# Altium PCB OnePieceBoard.PcbDoc (part 2 of 2)
Units mil, origin at the board's own origin, x right, y up, seen from the top; angles counter-clockwise.
Board outline 5749.09 x 7970 mil, 2 copper layers (Top Layer, Bottom Layer); 128 components, 61 nets, 384 pads, 43 vias.
Unrouted connection lines stored in the file: 1.
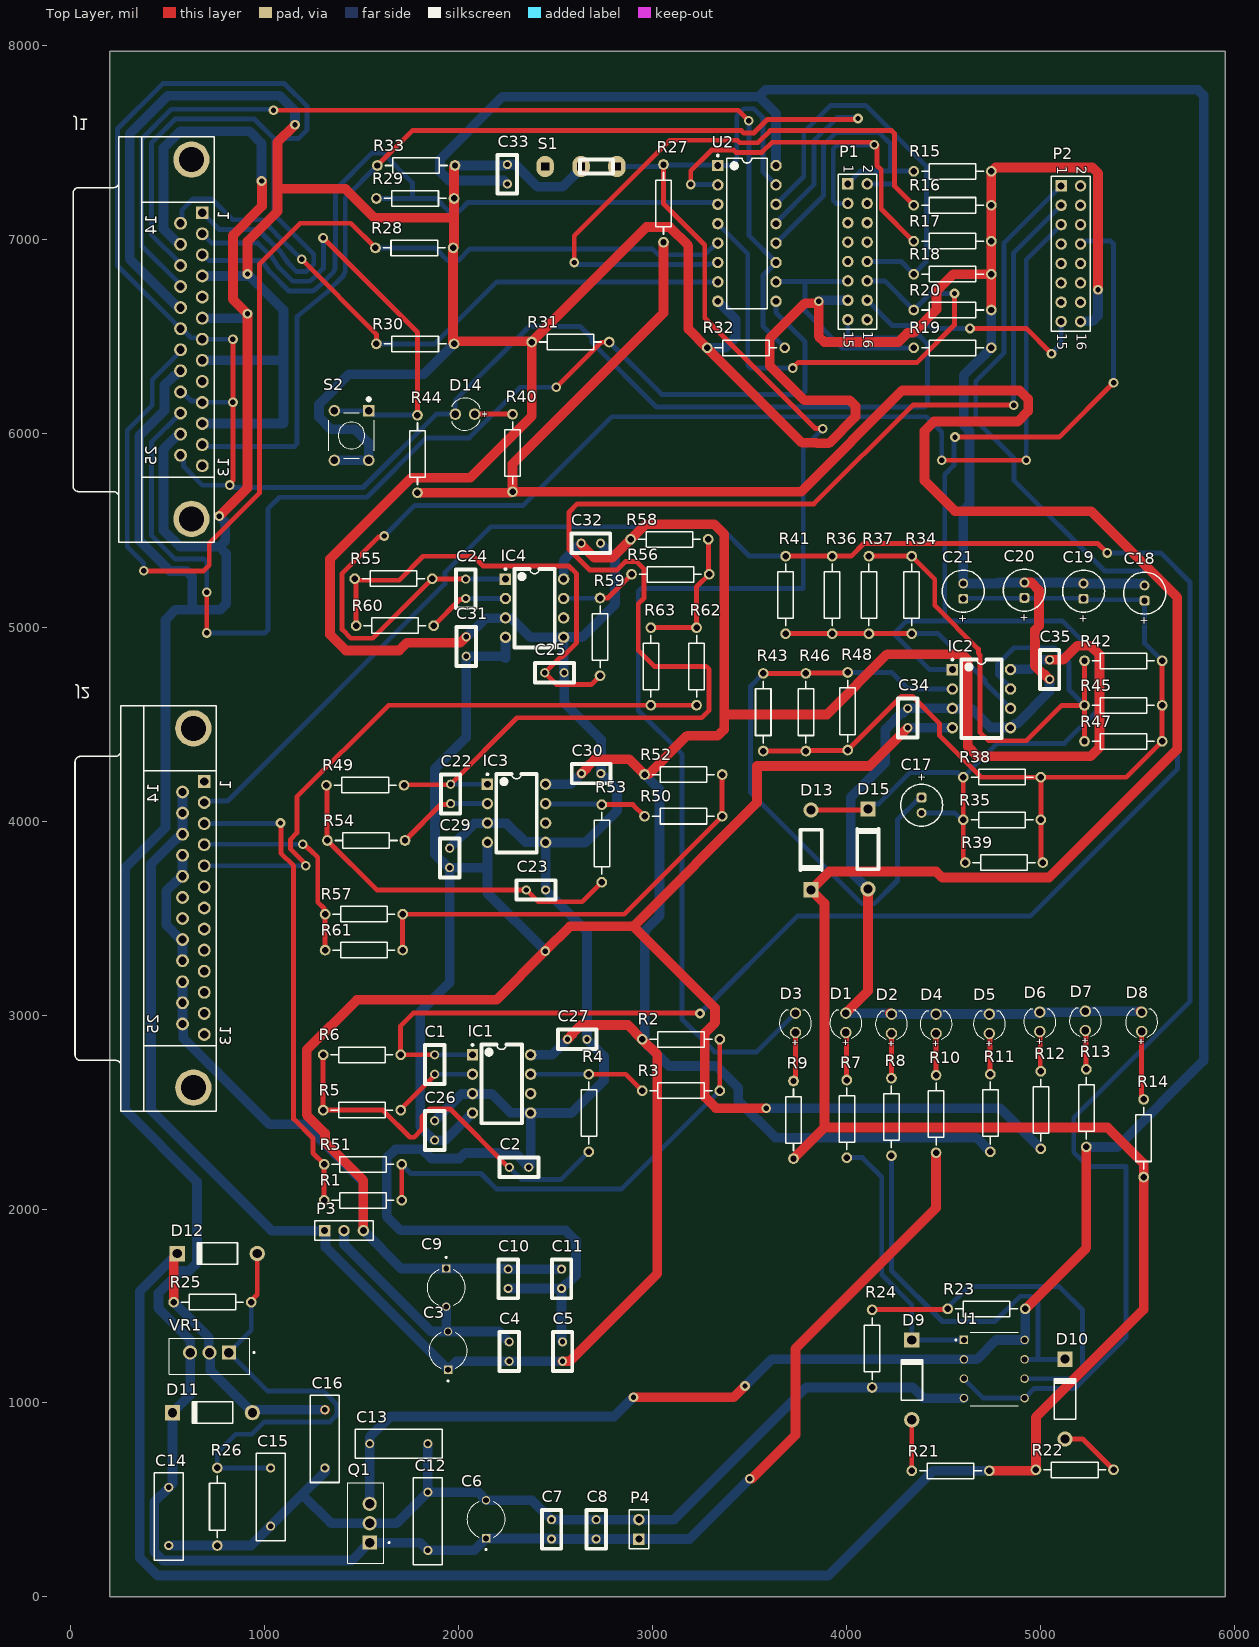
[diagram p0: Top Layer view]

## Via types
v1: diameter 50, hole 28, Top Layer to Bottom Layer, 43 vias

## Nets (pads, with @x,y where several pads share a name; then routed paths per layer and width w, separated by ;. In a path a pad name is that pad's centre, name@x,y a point inside that pad or via, vN(x,y) a via of type N, cw(c..) or ccw(c..) an arc to the next point about the centre after c; other vN are vias at no path point) (continued)
VIN_12: (continued)
  Bottom Layer w50: J1.24 560.53,5995.2 552.26,5986.93 546.93,5986.93 477.21,5917.21 477.21,5498.61 561.38,5414.43 765.71,5414.43 ; J1.21 560.53,6321.3 535.09,6295.87 530.51,6295.87 481.73,6247.09 481.73,6116.73 352.21,5987.21 352.21,5446.83 509.61,5289.43 595.71,5289.43 625,5260.14 625,5090 ; J1.15 560.53,6973.5 552.26,6981.77 547.67,6981.77 477.21,7052.24 477.21,7470.09 564.26,7557.15 919.47,7557.15 982.5,7494.11 v1(982.5,7300) ; J1.6 888.05,6593.05 v1(910,6615) ; v1(764.64,5572.67) 795,5542.31 795,5443.72 765.71,5414.43 ; v1(3500,610) 3188.42,298.42 P4.1 C8.1 C7.1 2474.37,301.57 C6.P 2078.43,240 C12.1 1800,280 Q1.1 1447.81,187.81 1028.13,187.81 1027.75,187.44 475.59,187.44 429.09,233.93 429.09,490 C14.1 523.19,584.09 D11.2 614.09,1040.91 VR1.3 614.09,1325.31 451.53,1487.87 451.53,1567.28 564.88,1680.63 608.27,1680.63 650,1722.36 650,2140 280,2510 280,3760 487.21,3967.21 487.21,5037.92 539.29,5090 625,5090 ; 625,5090 770.71,5090 800,5119.29 800,5380.14 765.71,5414.43
Vsa_out: IC2.7 R34.2 R37.2 R42.1 R45.1 R47.1 | length 3167.4
  Top Layer w25: R37.2 R34.2 4453.26,5247.06 4453.26,5111.74 4678.21,4886.79 4678.21,4865.26 4686.09,4857.39 4686.09,4705.13 4686.09,4458.91 4730.77,4414.23 4925.72,4414.23 5107.75,4596.26 R45.1 ; R47.1 R45.1 ; R42.1 R45.1
  Bottom Layer w25: IC2.7 4844.06,4686.47 4777.03,4753.5 4777.03,4809.02 4861.77,4893.76 5071.21,4893.76 5145.38,4819.59 5145.38,4676.2 R45.1
pads on no net: IC1.6 IC3.6 IC4.6 J1.5 J1.9 J1.13 J1.26 J1.27 J2.1 J2.6 J2.7 J2.8 J2.9 J2.10 J2.11 J2.12 J2.13 J2.19 J2.20 J2.26 J2.27 P1.4 P1.5 P1.6 P1.7 P1.8 P1.9 P1.16 P2.2 P2.4 P2.6 P2.7 P2.9 P2.10 P2.11 P2.12 P2.13 P2.14 S1.3

## Polygon pours and split planes (outlines as drawn)
GND on Bottom Layer "GND_L02_P000" (solid, remove dead copper, pour order 0): 5930,20 5940,30 5940,7960 210,7960 210,10

## Text inside footprints (layer, text, board x,y; h text height)
C17: Top Overlay "+" at 4405.01,4201.97 h39.37 r90
C18: Top Overlay "+" at 5515.64,5055.55 h39.37 r270
C19: Top Overlay "+" at 5200.64,5065.55 h39.37 r270
C20: Top Overlay "+" at 4895.64,5070.55 h39.37 r270
C21: Top Overlay "+" at 4580.64,5065.55 h39.37 r270
D1: Top Overlay "+" at 4008.78,2839.92 h31.5 r90
D2: Top Overlay "+" at 4243.78,2834.92 h31.5 r90
D3: Top Overlay "+" at 3748.78,2839.92 h31.5 r90
D4: Top Overlay "+" at 4473.78,2834.92 h31.5 r90
D5: Top Overlay "+" at 4748.78,2834.92 h31.5 r90
D6: Top Overlay "+" at 5008.78,2844.92 h31.5 r90
D7: Top Overlay "+" at 5243.78,2849.92 h31.5 r90
D8: Top Overlay "+" at 5533.78,2844.92 h31.5 r90
D14: Top Overlay "+" at 2151.5,6111.73 h31.5 r180
J1: Top Overlay "1" at 816.77,7146.4 h59.06 r90; Top Overlay "14" at 442.76,7126.5 h59.06 r90; Top Overlay "25" at 442.76,5935.71 h59.06 r90; Top Overlay "13" at 816.77,5876.44 h59.06 r90
J2: Top Overlay "25" at 452.76,3003.5 h59.06 r90; Top Overlay "14" at 452.76,4194.29 h59.06 r90; Top Overlay "13" at 826.77,2944.23 h59.06 r90; Top Overlay "1" at 826.77,4214.19 h59.06 r90
P1: Top Overlay "2" at 4085,7385 h50 r270; Top Overlay "1" at 3985,7385 h50 r270; Top Overlay "15" at 3985,6525 h50 r270; Top Overlay "16" at 4085,6525 h50 r270
P2: Top Overlay "2" at 5185,7375 h50 r270; Top Overlay "1" at 5085,7375 h50 r270; Top Overlay "15" at 5085,6515 h50 r270; Top Overlay "16" at 5185,6515 h50 r270